# Altium PCB Teeny.PcbDoc
Units mil, origin at the board's own origin, x right, y up, seen from the top; angles counter-clockwise.
Board outline 1000 x 600 mil, 2 copper layers (Top Layer, Bottom Layer); 14 components, 16 nets, 98 pads, 36 vias.
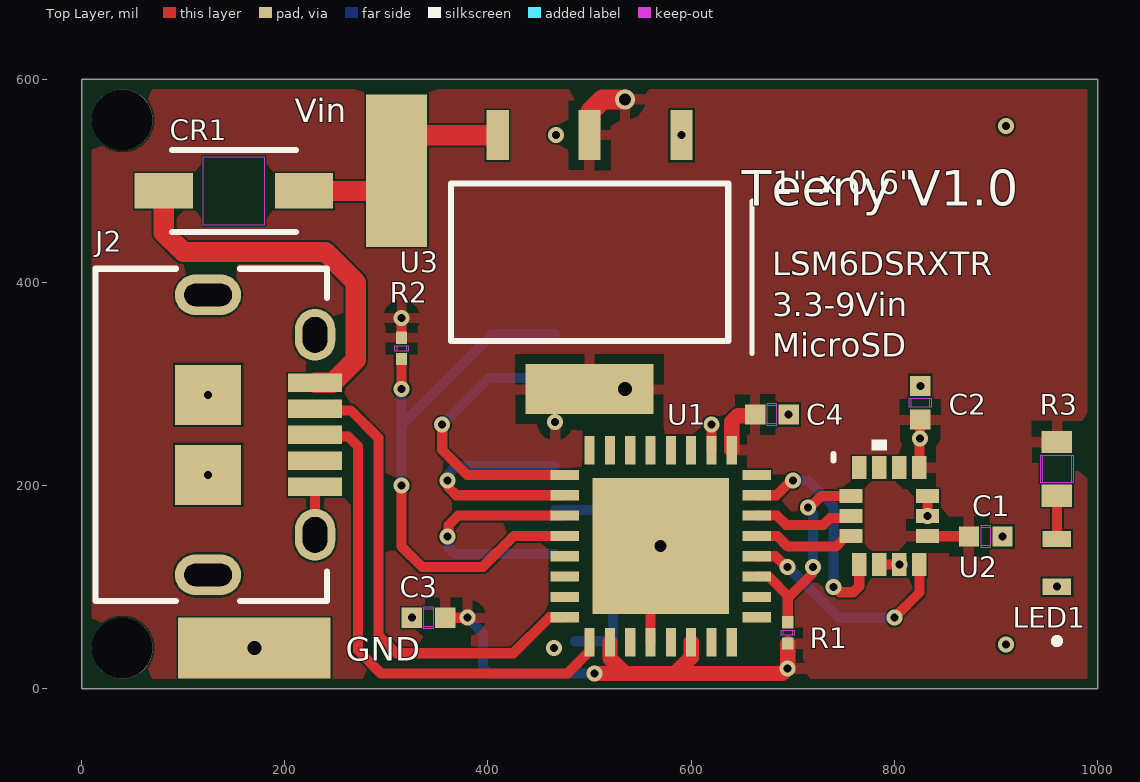
[diagram p0: Top Layer view]
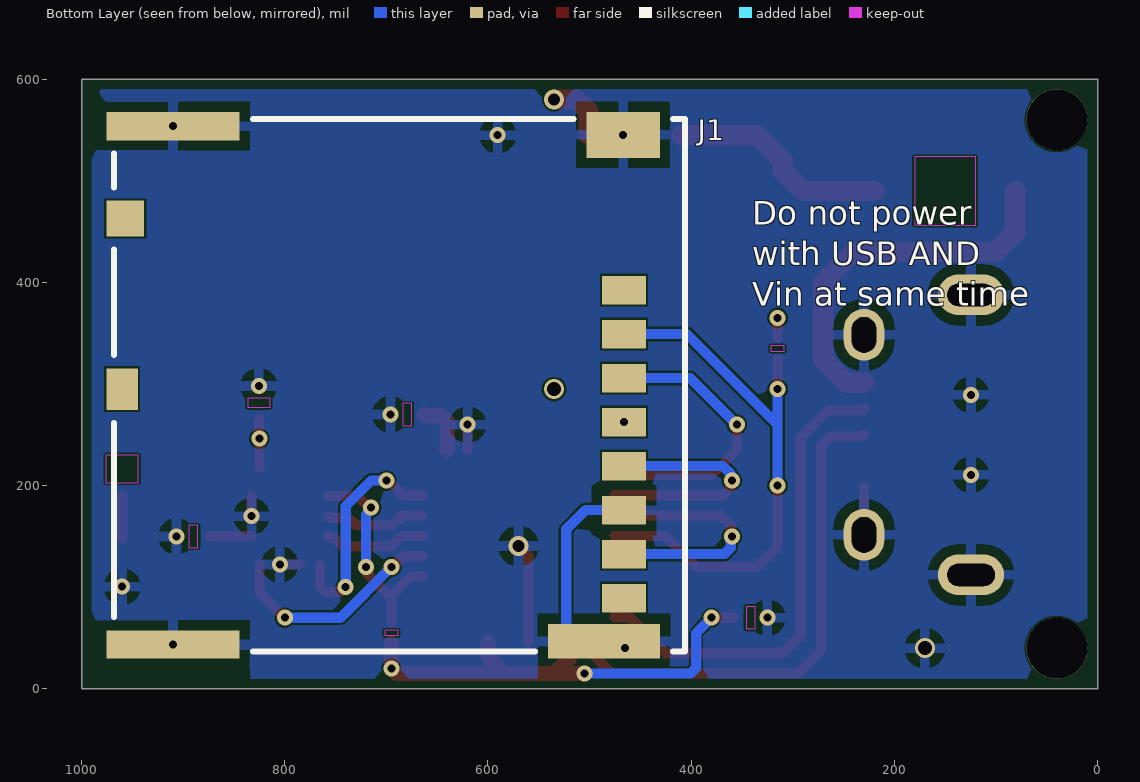
[diagram p1: Bottom Layer view, seen from below]
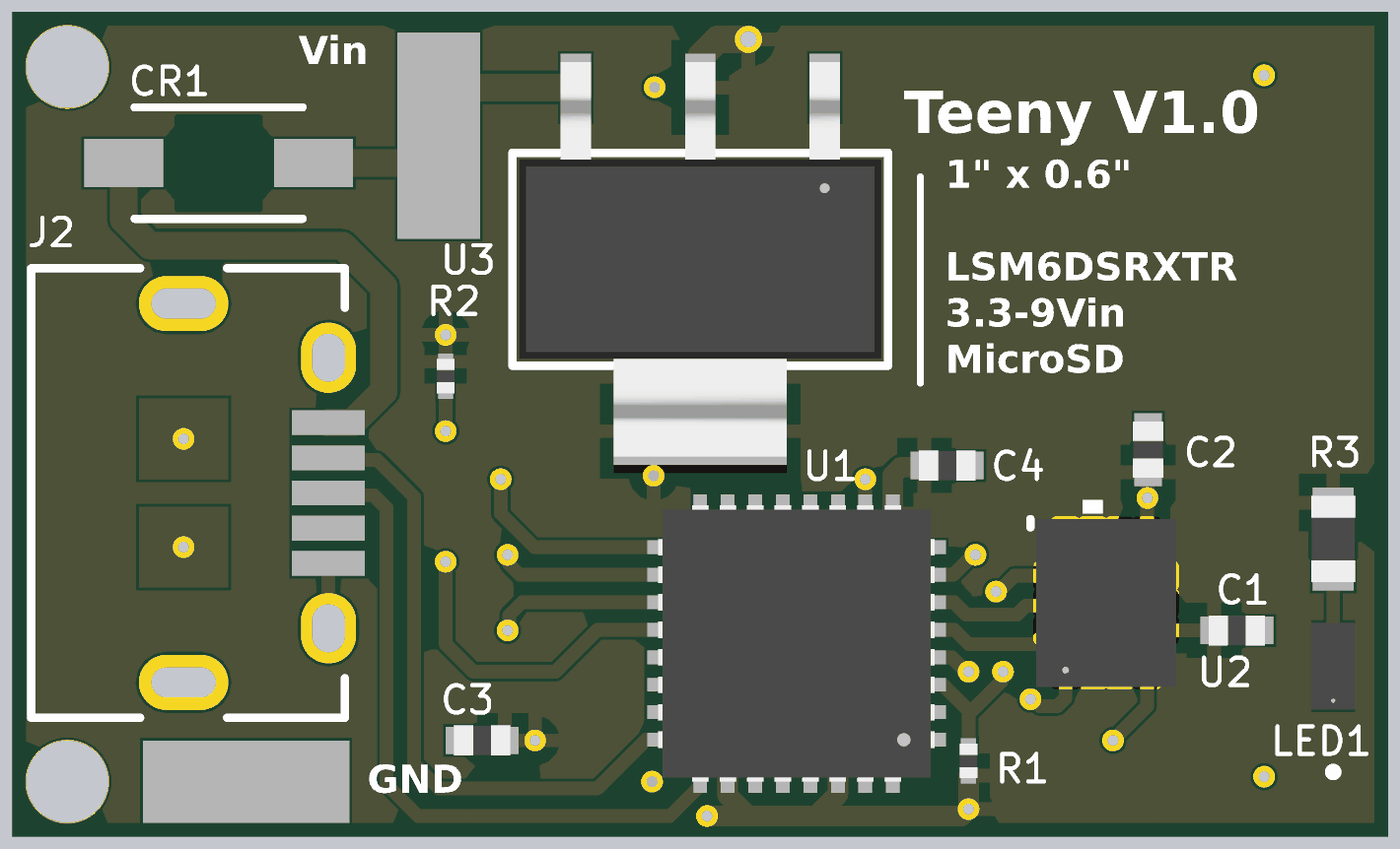
[diagram p2: 3D render of the assembled board from above, using the file's embedded part models]

## Layer stack, top to bottom
Top Solder: solder mask 0.4, Solder Resist, Dk 3.5
Top Layer: signal copper 1.4
Dielectric 1: dielectric 12.6, FR-4, Dk 4.8
Bottom Layer: signal copper 1.4
Bottom Solder: solder mask 0.4, Solder Resist, Dk 3.5

## Board outline
0,0 1000,0 1000,600 0,600

## Design rules (kind name [scope] priority, off if disabled: settings)
Clearance [All] p1: gap=2 ignorepadtopadclearanceinfootprint=FALSE
MinimumSolderMaskSliver [All] p1: minsoldermaskwidth=0.5
PolygonConnect [All] p1: connectstyle=Relief reliefconductorwidth=10 reliefentries=4 polygonreliefangle="90 Angle" airgapwidth=10
RoutingVias [All] p1: holewidth=28 width=50 viastyle="Through Hole" minholewidth=28 minwidth=50 maxholewidth=28 maxwidth=50
SolderMaskExpansion [All] p1: expansion=0 istentingtop=FALSE
SupplyNets "Schematic Supply Nets_2" [InNet('3V3')] p1: voltage=0.000
SupplyNets "Schematic Supply Nets_1" [InNet('GND')] p2: voltage=0.000
SupplyNets "Schematic Supply Nets" [InNet('Vin')] p3: voltage=0.000
Width [All] p1: maxlimit=30 minlimit=10 preferedwidth=10 minimp=50.000000 maximp=50.000000 favimp=50.000000
29 further rules are at their usual default settings.

## Components (designator, comment, footprint, x,y, rotation, side; value= is the part's Value field where it differs from the comment)
C1 "0.1uF" 0.1uF/16V 890,150 r180 top
C2 "0.1uF" 0.1uF/16V 825.49,281.5 r270 top
C3 "0.1uF" 0.1uF/16V 341.5,70 r0 top
C4 "0.1uF" 0.1uF/16V 679.47,269.98 r180 top
CR1 "SchDiode" SchDiode 150,490 r180 top
J1 "MicroSD" MicroSD 687.18,298.74 r270 bottom
J2 "MicroUSB" MicroUSB 127.73,250 r270 top
LED1 "GrnLED" GreenLED 960,124 r90 top
R1 "10k" 10k/0.05W 695,55 r270 top
R2 "10k" 10k/0.05W 315,335 r90 top
R3 "3.3k" 3.3k/0.1W 960,216.5 r270 top
U1 "MCU" MCU 570,140.5 r180 top
U2 "IMU" IMU 795,170 r90 top
U3 "LinReg" LinReg 500,420 r180 top

## Footprints (in the part's own frame and the unit in brackets; to place one, negate y for a bottom-side part, rotate by r counter-clockwise, add the part's x,y. Pads: shape width x height; smd on the part's side, far side on the other; paste and mask are expansions set on the pad)
0.1uF/16V [mil] "GRM155R71C104KA88D"
  rect 20x20 smd paste+0 mask+0: 1(-16.5,0) 2(16.5,0)
  Top Layer keep-out region: -4.5,-9 -4.5,9 4.5,9 4.5,-9
  Keep-Out Layer region: -4.5,-11 -4.5,11 4.5,11 4.5,-11
  body extent -21,-11 21,11, height 22
3.3k/0.1W [mil] "RC0603FR-073K3L"
  rect 22x30 smd paste+0 mask+0: 1(-26.5,0) 2(26.5,0)
  Top Layer keep-out region: -13.5,-14 -13.5,14 13.5,14 13.5,-14
  Keep-Out Layer region: -13.5,-16 -13.5,16 13.5,16 13.5,-16
  body extent -31,-16 31,16, height 28
10k/0.05W [mil] "RC0201FR-0710KL"
  rect 12x11 smd paste+0 mask+0: 1(-10.5,0) 2(10.5,0)
  Top Layer keep-out region: -2.5,-4.5 -2.5,4.5 2.5,4.5 2.5,-4.5
  Keep-Out Layer region: -2.5,-6.5 -2.5,6.5 2.5,6.5 2.5,-6.5
  body extent -13,-6 13,6, height 10
GreenLED [mil] "LTST-C190KGKT"
  rect 16x28 smd paste+0 mask+0: 1(-23.5,0) 2(23.5,0)
  silkscreen extent -80,-3 -74,3, body extent -31,-16 31,16, height 32
IMU [mm] "LSM6DSRXTR"
  rect 0.577x0.352 smd paste+0 mask+0.102: 1(-1.21,0.75) 2(-1.21,0.25) 3(-1.21,-0.25) 4(-1.21,-0.75) 8(1.21,-0.75) 9(1.21,-0.25) 10(1.21,0.25) 11(1.21,0.75)
  rect 0.352x0.577 smd paste+0 mask+0.102: 5(-0.5,-0.956) 6(0,-0.956) 7(0.5,-0.956) 12(0.5,0.956) 13(0,0.956) 14(-0.5,0.956)
  silkscreen extent 1.4,0.06 1.91,1.4, body extent -1.55,-1.3 1.55,1.3, height 0.87
LinReg [mil] "NCP1117ST33T3G"
  rect 22x49 smd paste+0 mask+0: 1(-90.5,-125) 2(0,-125) 3(90.5,-125)
  rect 126x49 smd paste+0 mask+0: 2(0,125)
  silkscreen extent -136,-78 136,78, body extent -131,-144 131,144, height 68
MCU [mil] "ATSAMD21E18A-MUT"
  rect 28x10 smd paste+0 mask+0: 1(-94.5,70) 2(-94.5,50) 3(-94.5,30) 4(-94.5,10) 5(-94.5,-10) 6(-94.5,-30) 7(-94.5,-50) 8(-94.5,-70) 17(94.5,-70) 18(94.5,-50) 19(94.5,-30) 20(94.5,-10) 21(94.5,10) 22(94.5,30) 23(94.5,50) 24(94.5,70)
  rect 10x28 smd paste+0 mask+0: 9(-70,-94.5) 10(-50,-94.5) 11(-30,-94.5) 12(-10,-94.5) 13(10,-94.5) 14(30,-94.5) 15(50,-94.5) 16(70,-94.5) 25(70,94.5) 26(50,94.5) 27(30,94.5) 28(10,94.5) 29(-10,94.5) 30(-30,94.5) 31(-50,94.5) 32(-70,94.5)
  rect 134x134 smd paste-67 mask+0: 33(0,0)
  body extent -101,-101 101,101, height 65
MicroSD [mil] "MEM2080-00-128-00-A"
  rect 35x37 smd paste+0 mask+0: DSW1(-164.17,-269.87)
  rect 41x31 smd paste+0 mask+0: DSW2(3.74,-272.82)
  rect 45x72 smd paste+0 mask+0: MNT1(-246.46,220.29)
  rect 34x110 smd paste+0 mask+0: MNT2(251.97,201.39)
  rect 28x131 smd paste-65.5 mask-65.5: MNT3(-255.12,-222.62) MNT4(255.12,-222.62)
  rect 28x43 smd paste+0 mask+0: P1(-93.7,221.08) P2(-50.39,221.08) P3(-7.09,221.08) P4(36.22,221.08) P5(79.53,221.08) P6(122.83,221.08) P7(166.14,221.08) P8(209.45,221.08)
  silkscreen extent -262,-281 262,281
MicroUSB [mil] "10118194-0001LF"
  rect 18x53 smd paste+0 mask+0: 1(-51.18,102.11) 2(-25.59,102.11) 3(0,102.11) 4(25.59,102.11) 5(51.18,102.11)
  rect 59x65 smd paste-32.5 mask-32.5: 10(-39.37,-3.2) 11(39.37,-3.2)
  oval 40x65 hole 22 slot 47 at 90 deg paste-99999 mask+0: S_1(-137.8,-3.2) S_2(137.8,-3.2)
  oval 51x40 hole 24 slot 35 at 0 deg paste-99999 mask+0: S_3(-98.43,102.11) S_4(98.43,102.11)
  silkscreen extent -164,-114 164,114
SchDiode [mil] "B5819W-TP"
  rect 57.37x34.94 smd paste+0 mask+0: 1(-68.97,0) 2(68.97,0)
  Keep-Out Layer region: -30,-33.5 -30,33.5 30,33.5 30,-33.5
  silkscreen extent -61,-41 61,41

## Part data
C1 C2 C3 C4: library part 0.1uF/16V, "GRM155R71C104KA88D", Manufacturer_Name=Murata, Copyright="Copyright (C) 2026 Ultra Librarian. All rights reserved.", Manufacturer_Part_Number=GRM155R71C104KA88D
CR1: library part "Schottky Diode", "B5819W-TP", Manufacturer_Name=MCC, Copyright="Copyright (C) 2025 Ultra Librarian. All rights reserved.", Manufacturer_Part_Number=B5819W-TP
J1: "MEM2080-00-128-00-A", Manufacturer_Name="Global Connector Technology", Copyright="Copyright (C) 2025 Ultra Librarian. All rights reserved.", Manufacturer_Part_Number=MEM2080-00-128-00-A, RefDes=RefDes, Type=Type
J2: "10118194-0001LF", Manufacturer_Name="Amphenol ICC", Copyright="Copyright (C) 2026 Ultra Librarian. All rights reserved.", Manufacturer_Part_Number=10118194-0001LF, RefDes=RefDes, Type=Type
LED1: library part GreenLED, "LTST-C190KGKT", Manufacturer_Name=LITE-ON, Copyright="Copyright (C) 2025 Ultra Librarian. All rights reserved.", Manufacturer_Part_Number=LTST-C190KGKT
R1 R2: library part 10k/0.05W, "RC0201FR-0710KL", Manufacturer_Name=Yageo, Copyright="Copyright (C) 2025 Ultra Librarian. All rights reserved.", Manufacturer_Part_Number=RC0201FR-0710KL
R3: library part 3.3k/0.1W, "RC0603FR-073K3L", Manufacturer_Name=Yageo, Copyright="Copyright (C) 2025 Ultra Librarian. All rights reserved.", Manufacturer_Part_Number=RC0603FR-073K3L
U1: "ATSAMD21E18A-MUT", Manufacturer_Name=Microchip, Copyright="Copyright (C) 2026 Ultra Librarian. All rights reserved.", Manufacturer_Part_Number=ATSAMD21E18A-MUT, RefDes=RefDes, Type=Type
U2: "LSM6DSRXTR", Manufacturer_Name=STMicroelectronics, Copyright="Copyright (C) 2025 Ultra Librarian. All rights reserved.", Manufacturer_Part_Number=LSM6DSRXTR, RefDes=RefDes, Type=Type
U3: "NCP1117ST33T3G", Manufacturer_Name=onsemi, Copyright="Copyright (C) 2026 Ultra Librarian. All rights reserved.", Manufacturer_Part_Number=NCP1117ST33T3G, RefDes=RefDes, Type=Type

## Free pads (board coordinates)
  rect 150x60 smd paste+0 mask+0: 7(170,40)
  rect 60x150 smd paste+0 mask+0: 7(310,510)
  round 60 hole 60: ""(40,40) ""(40,560)

## Via types
v1: diameter 15.75, hole 7.87, Top Layer to Bottom Layer, 32 vias
v2: diameter 19.68, hole 13.78, Top Layer to Bottom Layer, 2 vias
v3: diameter 19.68, hole 11.81, Top Layer to Bottom Layer, 2 vias

## Nets (pads, with @x,y where several pads share a name; then routed paths per layer and width w, separated by ;. In a path a pad name is that pad's centre, name@x,y a point inside that pad or via, vN(x,y) a via of type N, cw(c..) or ccw(c..) an arc to the next point about the centre after c; other vN are vias at no path point)
3V3: C1.2 C2.2 C3.2 C4.2 J1.P4 R1.2 R2.2 R3.1 U1.9 U1.26 U1.30 U2.5 U2.8 U3.2 | length 705.8
  Top Layer w10: R2.2 v1(315,365) ; C3.2 v1(380,70) ; U2.8 824.77,217.89 824.77,246.08 825.25,246.56 825.25,264.76 C2.2 ; U2.5 832.81,150.16 873.34,150.16 C1.2
  Top Layer w15: v1(505,15) 535,15 ; U1.26 520,30 535,15 ; U1.30 600,30.85 584.15,15 ; U1.9 640,262.96 645.86,268.82 661.81,268.82 C4.2 ; R1.2 v1(695,20) 694.8,20 689.8,15 584.15,15 ; 535,15 584.15,15
  Top Layer w20: U3.2@500,545 501,546 501,568.28 512.72,580 v3(535,580)
  Bottom Layer w10: v1(380,70) 395,55 395,20.86 400.86,15 v1(505,15)
  other v1: 825.01,246.32 466.1,262.52
  other v2: 535,295
CS: R1.1 U1.3 U2.12 | length 212.6
  Top Layer w10: U1.3 676.23,110.5 696.33,90.4 ; R1.1 695,89.07 696.33,90.4 ; v1(715,178.25) 716.56,178.25 728.15,189.84 757.19,189.84 U2.12 ; v1(720,120) 718.9,118.9 718.9,112.97 696.33,90.4
  Bottom Layer w10: v1(715,178.25) 715,176.69 720,171.69 v1(720,120)
GND: C1.1 C2.1 C3.1 C4.1 J1.MNT1 J1.MNT2 J1.MNT3 J1.MNT4 J1.P6 J2.5 J2.10 J2.11 J2.S_1 J2.S_2 J2.S_3 J2.S_4 LED1.1 pad.7@170,40 U1.10 U1.28 U1.33 U2.2 U2.3 U2.6 U2.7 U3.1 | length 425.1
  Top Layer w10: J2.S_4 J2.5 ; U1.28 560,130.5 v3(570,140.5) ; U1.10 v1(620,260) ; U2.2 v1(804.84,122.35) ; U2.6@830.73,168.08 v1(832.65,170) U2.7
  Bottom Layer w10: J1.P6 504.09,175.91 523,157 523,46.77 J1.MNT2
  other v1: 465,40 909.8,43.62 325,70 960,100.5 906.5,150 124.53,210.63 695.97,269.98 124.53,289.37 825.49,298 466.89,545.2 590.5,545 909.8,553.86
  other v2: 170,40
INT1: U1.4 U2.4 | length 223.3
  Top Layer w10: U1.4 682.94,130.5 693.44,120 v1(695,120) ; v1(800,70) 824.76,94.76 824.76,122.11 U2.4
  Bottom Layer w10: v1(695,120) 745,70 v1(800,70)
M_CS: J1.P2 R2.1 U1.20 | length 553.9
  Top Layer w10: v1(315,200) 315,140 335,120 395,120 425.5,150.5 U1.20 ; v1(315,295) R2.1
  Bottom Layer w10: v1(315,200) 315,260 ; v1(315,295) 315,260 ; J1.P2 404.13,349.13 315,260
M_MISO: J1.P7 U1.19 | length 249
  Top Layer w10: v1(360,150) 361.1,151.1 361.1,161.1 370.5,170.5 U1.19
  Bottom Layer w10: v1(360,150) 361.1,148.9 361.1,138.9 367.4,132.6 J1.P7
M_MOSI: J1.P3 U1.17 | length 285.7
  Top Layer w10: v1(355,260) 355,235 379.5,210.5 U1.17
  Bottom Layer w10: v1(355,260) 400.83,305.83 J1.P3
M_SCK: J1.P5 U1.18 | length 240.1
  Top Layer w10: v1(360,205) 361.1,203.9 361.1,198.13 368.73,190.5 U1.18
  Bottom Layer w10: v1(360,205) 361.1,206.1 361.1,211.58 368.73,219.21 J1.P5
MISO: U1.7 U2.1 | length 223.3
  Top Layer w10: U1.7 683.94,190.5 698.44,205 v1(700,205) ; v1(740,100) 741.56,100 746.56,95 759.61,95 765.47,100.86 U2.1
  Bottom Layer w10: v1(700,205) 715,205 740,180 v1(740,100)
MOSI: U1.5 U2.14 | length 101.5
  Top Layer w10: U1.5 684.7,150.5 695.2,140 742.61,140 751,148.4 755.43,148.4 U2.14
NetCR1_2: CR1.2 J2.1 | length 376
  Top Layer w20: CR1.2 81.03,448.97 100,430 240,430 270,400 270,323.84 247.34,301.18 J2.1
NetLED1_2: LED1.2 R3.2 | length 42.5
  Top Layer w10: LED1.2 R3.2
SCK: U1.6 U2.13 | length 100.2
  Top Layer w10: U1.6 684.5,170.5 693.63,161.37 730.24,161.37 736.94,168.08 755.43,168.08 U2.13
U_D+: J2.3 U1.25 | length 503.3
  Top Layer w10: J2.3 231.43,248.41 262.56,248.41 272.13,238.84 272.13,37.87 295,15 478,15 500,37 U1.25
U_D-: J2.2 U1.24 | length 473.8
  Top Layer w10: J2.2 231.43,274 265.25,274 292.13,247.12 292.13,52.87 310,35 425,35 460.5,70.5 U1.24
Vin: CR1.1 pad.7@310,510 U3.3 | length 219.2
  Top Layer w20: CR1.1 290,490 310,510 310,520 335,545 U3.3
pads on no net: J1.DSW1 J1.DSW2 J1.P1 J1.P8 J2.4 U1.1 U1.2 U1.8 U1.11 U1.12 U1.13 U1.14 U1.15 U1.16 U1.21 U1.22 U1.23 U1.27 U1.29 U1.31 U1.32 U2.9 U2.10 U2.11

## Polygon pours and split planes (outlines as drawn)
GND on Bottom Layer "GND_L02_P001" (solid, pour order 1): 10,10 990,10 990,590 10,590
3V3 on Top Layer "3V3_L01_P000" (solid, pour order 0): 10,10 990,10 990,590 10,590

## Silkscreen, mask and mechanical layers (free items; w line width, h text height)
Top Overlay:
  lines w5: 660,330 660,480
  text "Vin" at 210,550 h40
  text "Teeny V1.0" at 650,463.83 h60
  text "1\" x 0.6\" /  / LSM6DSRXTR / 3.3-9Vin / MicroSD" at 680,319.08 h40
  text "GND" at 260,20 h40
Bottom Overlay:
  text "Do not power / with USB AND / Vin at same time" at 340,369.08 h40